# Altium PCB ZeroDriftLatchComp.PcbDoc
Units mil, origin at the board's own origin, x right, y up, seen from the top; angles counter-clockwise.
Board outline 500 x 500 mil, 2 copper layers (TOP COPPER, BOTTOM COPPER), stack 60.8 mil thick; 15 components, 11 nets, 31 pads, 6 vias.
Unrouted connection lines stored in the file: 16.
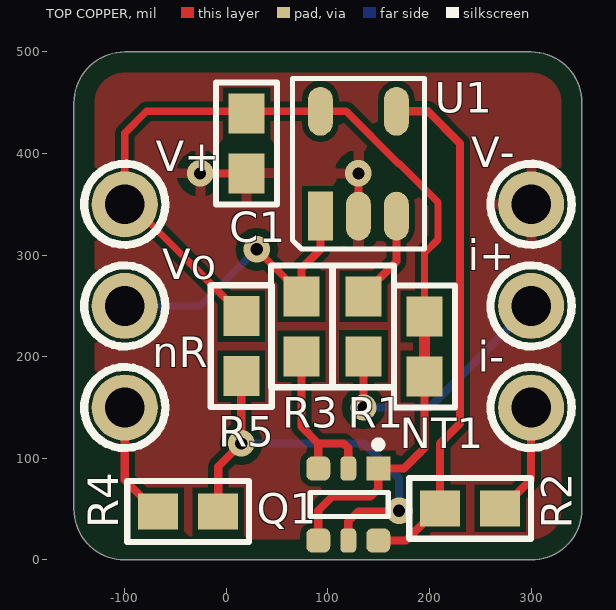
[diagram p0: TOP COPPER view]
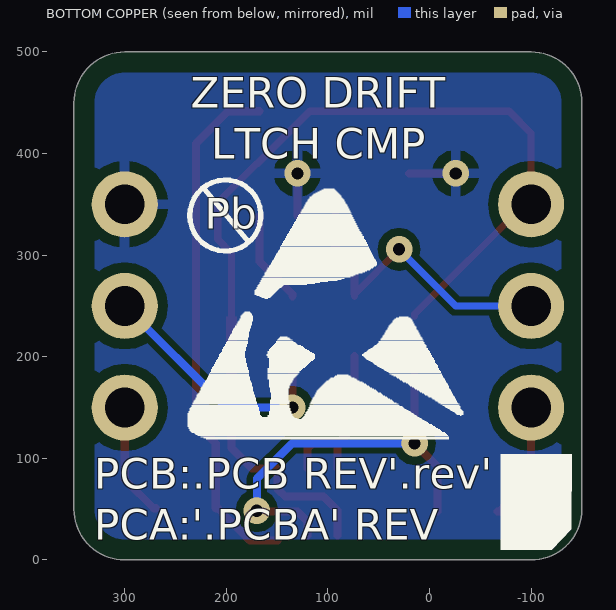
[diagram p1: BOTTOM COPPER view, seen from below]

## Layer stack, top to bottom
TOP SOLDER: solder mask 0.4, Solder Resist, Dk 3.5
TOP COPPER: signal copper 1.4
CORE: core 58, FR-4, Dk 4.8
BOTTOM COPPER: signal copper 1.4
BOTTOM SOLDER: solder mask 0.4, Solder Resist, Dk 3.5

## Board outline
-100,0 cw(c-100,50) -150,50 -150,450 cw(c-100,450) -100,500 300,500 cw(c300,450) 350,450 350,50 cw(c300,50) 300,0

## Design rules (kind name [scope] priority, off if disabled: settings)
AssemblyTestPointUsage [All] p1 off: valid=2
AssemblyTestpoint [(IsPad And (OnTopLayer Or OnBottomLayer)) Or (IsPad And OnMultiLayer)] p1 off: testpointundercomponent=FALSE minsize=26 maxsize=200 preferedsize=60 minholesize=0 maxholesize=100 preferedholesize=32 testpointgrid=5 usegrid=FALSE gridtolerance=1 allowsidetop=TRUE allowsidebottom=TRUE
BoardOutlineClearance [All] p1: gap=20 ignorepadtopadclearanceinfootprint=FALSE except(0: Arc-SplitContinuation Track-SplitContinuation SMDPad-SplitContinuation THPad-SplitContinuation Via-SplitContinuation Fill-SplitContinuation Poly-SplitContinuation Region-SplitContinuation Text-SplitContinuation)
Clearance Clearance_Typ [All] p1: gap=6 ignorepadtopadclearanceinfootprint=TRUE except(5: Via-Hole; 8: Via-Fill Via-Poly Via-Region; 10: Arc-Hole Track-Hole SMDPad-Hole THPad-THPad THPad-Fill THPad-Poly THPad-Region THPad-Hole Fill-Hole Poly-Hole Region-Hole Text-Hole)
ComponentClearance Fiducial [HasFootprint('FID')] p1: gap=7 collisioncheckmode=3 verticalgap=0 showdistances=FALSE
ComponentClearance "TP Clearance" [HasFootprint('TP')] p2: gap=5 collisioncheckmode=3 verticalgap=10 showdistances=FALSE // 6mil for test points
ComponentClearance [All] p3: gap=-5 collisioncheckmode=3 verticalgap=100000 showdistances=FALSE
DiffPairsRouting "USB 90ohm Zd" [(InDifferentialPairClass('USB 90ohm Zd'))] p1: maxlimit=15 minlimit=7 mostfreqgap=8 toplayer_minwidth=8 toplayer_maxwidth=25 toplayer_prefwidth=12 bottomlayer_minwidth=8 bottomlayer_maxwidth=25 bottomlayer_prefwidth=12 maxuncoupledlength=500
DiffPairsRouting [All] p2: maxlimit=10 minlimit=10 mostfreqgap=10 toplayer_minwidth=15 toplayer_maxwidth=15 toplayer_prefwidth=15 bottomlayer_minwidth=15 bottomlayer_maxwidth=15 bottomlayer_prefwidth=15 maxuncoupledlength=500
FabricationTestPointUsage [All] p1 off: valid=2 allowmultiple=FALSE
FabricationTestpoint [(IsPad And (OnTopLayer Or OnBottomLayer)) Or (IsPad And OnMultiLayer)] p1 off: side=3 testpointundercomponent=TRUE minsize=26 maxsize=200 preferedsize=60 minholesize=0 maxholesize=100 preferedholesize=32 testpointgrid=5 allowsidetop=TRUE allowsidebottom=TRUE usegrid=FALSE gridtolerance=1
HoleSize [All] p1: absolutevalues=TRUE maxlimit=300 minlimit=8 maxpercent=80.000 minpercent=20.000
HoleToHoleClearance "Ignore in pad vias" [(HasFootprint('0805 FeedThru CAP Filter') OR HasFootprint('16-PIN DFN W/THERMAL PAD'))] p1: gap=0 allowstackedmicrovias=TRUE
HoleToHoleClearance [All] p2: gap=10 allowstackedmicrovias=TRUE
MinimumAnnularRing [All] p1: minimumring=3
MinimumSolderMaskSliver MinimumSolderMaskSliver_1 [All] p1: minsoldermaskwidth=0
MinimumSolderMaskSliver "Solder Sliver BGA" [HasFootprint('4-WLP (0.84x0.84)')] p2: minsoldermaskwidth=0
MinimumSolderMaskSliver "Solder Sliver Footprint" [HasFootprint('QFN 16 EXPOSE PAD (3x3)')] p3: minsoldermaskwidth=0
MinimumSolderMaskSliver [All] p4: minsoldermaskwidth=2
PermittedLayers [All] p1: toplayerpermitted=TRUE bottomlayerpermitted=TRUE
PlaneConnect BatteryClipConnect [(HasFootprint('Battery Clip 2915'))] p1: pad.planeconnectstyle=Direct pad.reliefexpansion=20 pad.reliefentries=4 pad.reliefconductorwidth=10 pad.reliefairgap=10 via.planeconnectstyle=Relief via.reliefexpansion=20 via.reliefentries=4 via.reliefconductorwidth=10 via.reliefairgap=10
PlaneConnect HeaderConnect [(HasFootprint('Header 2 Pos 50mil'))] p2: pad.planeconnectstyle=Direct pad.reliefexpansion=20 pad.reliefentries=4 pad.reliefconductorwidth=10 pad.reliefairgap=10 via.planeconnectstyle=Relief via.reliefexpansion=20 via.reliefentries=4 via.reliefconductorwidth=10 via.reliefairgap=10
PlaneConnect [All] p3: planeconnectstyle=Relief reliefexpansion=10 reliefentries=4 reliefconductorwidth=8 reliefairgap=8
PolygonConnect "RF Shield Via" [InNet('AGND') vs IsNamedPolygon('AGND-TOP')] p1: thpad.connectstyle=Direct thpad.reliefconductorwidth=10 thpad.reliefentries=4 thpad.polygonreliefangle="90 Angle" thpad.airgapwidth=10 smdpad.connectstyle=Relief smdpad.reliefconductorwidth=10 smdpad.reliefentries=4 smdpad.polygonreliefangle="90 Angle" smdpad.airgapwidth=10 via.connectstyle=Direct via.reliefconductorwidth=10 via.reliefentries=4 via.polygonreliefangle="90 Angle" via.airgapwidth=10
PolygonConnect [All] p2: connectstyle=Relief reliefconductorwidth=10 reliefentries=4 polygonreliefangle="90 Angle" airgapwidth=10
RoutingVias [All] p1: holewidth=12 width=26 viastyle="Through Hole" minholewidth=8 minwidth=20 maxholewidth=28 maxwidth=42
SMDEntry [All] p1: side=TRUE corner=TRUE anyangle=FALSE
SMDToCorner SMDToCorner_Balun [(InNet('NetU7_3') OR InNet('NetU7_4'))] p1: distance=0
SMDToCorner [All] p2: distance=30000
SilkToSilkClearance [All] p1: silktosilkclearance=0
SilkToSolderMaskClearance [IsPad] p1: minsilkscreentomaskgap=0 clearancetoexposedcopper=FALSE
SolderMaskExpansion "Fine pitch foot prints" [HasFootprint('LQFP100') OR HasFootprint('LTC2448QFN-38N') OR HasFootprint('MSOP8') OR HasFootprint('16-pin DFN w/thermal pad') OR HasFootprint('10-PIN DFN W/THERMAL PAD')] p1: expansion=1 istentingtop=FALSE
SolderMaskExpansion [All] p2: expansion=2 istentingtop=FALSE
Width Width_General [All] p1: maxlimit=10 minlimit=7 preferedwidth=8 minimp=50.000000 maximp=50.000000 favimp=50.000000
18 further rules are at their usual default settings.

## Components (designator, comment, footprint, x,y, rotation, side; value= is the part's Value field where it differs from the comment)
C1 "0.1uF" "0603 CAP" 20,410 r270 top
i+ "Test Point PTH" "TP - PTH" 300,250 r0 top
i- "Test Point PTH" "TP - PTH" 300,150 r0 top
nR "Test Point PTH" "TP - PTH" -100,150 r180 top
NT1 "0.8Amax" "0603 NetTie" 195,210 r270 top net-tie
Q1 "NX3008PBKS,115" SOT363 149.53,90 r270 top
R1 "1k" "0603 RES" 134.99,230 r90 top
R2 "1k" "0603 RES" 240,50.83 r180 top
R3 "10k" "0603 RES" 74,230 r90 top
R4 "1k" "0603 RES" -37.54,47.76 r180 top
R5 "10k" "0603 RES" 14.68,210.36 r270 top
U1 "NCS21871SN2T1G" SOT-23-5 130,390 r90 top
V+ "Test Point PTH" "TP - PTH" -100,350 r270 top
V- "Test Point PTH" "TP - PTH" 300,350 r0 top
Vo "Test Point PTH" "TP - PTH" -100,250 r0 top

## Footprints (in the part's own frame and the unit in brackets; to place one, negate y for a bottom-side part, rotate by r counter-clockwise, add the part's x,y. Pads: shape width x height; smd on the part's side, far side on the other; paste and mask are expansions set on the pad)
"0603 CAP" [mm] "0603 Capacitor"
  rect 1x0.9 smd: 1(-0.75,0) 2(0.75,0)
  silkscreen extent -1.52,-0.76 1.52,0.76, body extent -0.81,-0.41 0.81,0.41, height 0.95
"0603 NetTie" [mm] "0603 NetTie"
  rect 1x0.9 smd: 1(-0.75,0) 2(0.75,0)
  TOP COPPER region: -0.75,0.127 0.762,0.127 0.762,-0.127 -0.75,-0.127
  silkscreen extent -1.52,-0.76 1.52,0.76
"0603 RES" [mm] "0603 Resistor"
  rect 1x0.9 smd: 1(-0.75,0) 2(0.75,0)
  silkscreen extent -1.52,-0.76 1.52,0.76, body extent -0.81,-0.41 0.81,0.41, height 0.95
SOT363 [mm]
  rect 0.6x0.6 smd: 1(0,0)
  rrect50% 0.6x0.4 smd: 2(0,-0.75) 5(1.8,-0.75)
  rrect50% 0.6x0.6 smd: 3(0,-1.5) 4(1.8,-1.5) 6(1.8,0)
  silkscreen extent -0.68,-1.7 1.2,0.25, body extent -0.15,-1.75 1.95,0.25, height 0.96
SOT-23-5 [mm]
  rect 1.22x0.62 smd: 1(-1.31,0.95)
  oval 1.22x0.62 smd: 2(-1.31,0) 3(-1.31,-0.95) 4(1.31,-0.95) 5(1.31,0.95)
  silkscreen extent -2.13,-1.65 2.13,1.65, body extent -1.57,-1.55 1.63,1.55, height 1.45
"TP - PTH" [mil] "PTH test point"
  round 65 hole 39 mask+2: 1(0,0)
  silkscreen extent -40,-40 40,40

## Part data
C1: library part C-0603-0u10-J50V-X7RC, "CAP CER 0.1UF 50V X7R 0603", AltMPN=GRM188R71H104JA93D, AltMPN1=C0603C104J5RACTU, MPN=CC0603JRX7R9BB104, Temperature Coefficient=X7R, Tolerance=J-5%, Vendor Max Voltage=50V, AltMfg=Murata, AltMfg1=KEMET, AVL="DigiKey, Mouser, Newark, Avnet, Arrow, Future, Allied, TTI, Heilind, Sager, Manufacturer Direct, Venkel", Component=CAPACITOR, Mfg=Yageo, Type=CERAMIC
i+ i- nR V+ V- Vo: "PTH Test Point"
NT1: library part 0603_NetTie, "RES 0 OHM 1/10W 1% 0603 SMD Thick Film Resistor", HelpURL=http://www.smtnet.com/library/files/upload/NetTies-and-How-to-Use-Them.pdf
Q1: "NX3008PBKS - 30 V, 200 mA dual P-channel Trench MOSFET", Supplier Part Number 1=1727-1282-1-ND, Mfg=Nexperia, MPN=NX3008PBKS,115, Pricing 1="1=0.33000, 10=0.24800, 25=0.21720, 100=0.11780, 500=0.09610, 1000=0.07130 (USD)", RoHS=No, Stock 1=86588, Supplier 1=Digi-Key
R1 R2 R4: library part R-0603-1K00-B-G, "RES SMD 1K OHM 0.1% 1/10W 0603", AltMPN=ERA-3AEB102V, AltMPN1=TFCR0603-10W-E-1001BT, MPN=RT0603BRB071KL, Power=0.1W, Tolerance=B-0.1%, AltMfg=Panasonic, AltMfg1=Venkel, AVL="DigiKey, Mouser, Newark, Avnet, Arrow, Future, Allied, TTI, Heilind, Sager, Manufacturer Direct, Venkel", HelpURL="G:\DATA\ISB Engineering\Electronics\AltiumWF\Libraries\Datasheets\Resistors\Yageo RT Series Thin Film Resistors.pdf", Mfg=Yageo
R3 R5: library part R-0603-10K0-B-G, "RES SMD 10K OHM 0.1% 1/10W 0603", AltMPN=ERA-3AEB103V, AltMPN1=TFCR0603-10W-E-1002BT, MPN=RT0603BRD0710KL, Power=0.1W, Tolerance=B-0.1%, AltMfg=Panasonic, AltMfg1=Venkel, AVL="DigiKey, Mouser, Newark, Avnet, Arrow, Future, Allied, TTI, Heilind, Sager, Manufacturer Direct, Venkel", HelpURL="G:\DATA\ISB Engineering\Electronics\AltiumWF\Libraries\Datasheets\Resistors\Yageo RT Series Thin Film Resistors.pdf", Mfg=Yageo
U1: Supplier Part Number 1=C316C622F2G5TA7301-ND, Mfg="ON Semiconductor", MPN=NCS21871SN2T1G, Pricing 1="2500=1.00588 (USD)", RoHS=No, Supplier 1=Digi-Key

## Via types
v1: diameter 26, hole 12, TOP COPPER to BOTTOM COPPER, tented both sides, 6 vias

## Nets (pads, with @x,y where several pads share a name; then routed paths per layer and width w, separated by ;. In a path a pad name is that pad's centre, name@x,y a point inside that pad or via, vN(x,y) a via of type N, cw(c..) or ccw(c..) an arc to the next point about the centre after c; other vN are vias at no path point)
GND: C1.2 U1.2 V-.1 | length 87.8
  TOP COPPER w8: v1(-25.78,380.47) C1.2 ; U1.2 v1(130,380.47)
Neti+_1: i+.1 R1.1 | length 256.9
  TOP COPPER w8: v1(134.99,150) R1.1
  BOTTOM COPPER w8: v1(134.99,150) 200,150 i+.1
Neti-_1: i-.1 R2.1 | length 112.9
  TOP COPPER w8: R2.1 271.5,50.83 300,79.34 i-.1
NetnR_1: nR.1 R4.2 | length 117
  TOP COPPER w8: nR.1 -100,78.73 -69.03,47.76 R4.2
NetNT1_2: NT1.2 Q1.1 Q1.4 | length 236.7
  TOP COPPER w8: Q1.4@90.47,24 90.47,48.71 104.26,62.49 142.02,62.49 149.53,70 Q1.1 174.82,90 195,110.18 NT1.2
NetQ1_2: Q1.2 Q1.3 R3.1 | length 168.8
  TOP COPPER w8: R3.1 74,131.15 90.47,114.68 ; Q1.3 90.47,114.68 ; Q1.2 120,109.99 115.31,114.68 90.47,114.68
NetQ1_5: Q1.5 R4.1 R5.2 | length 411.9
  TOP COPPER w8: R4.1 -8.01,91.99 v1(14.68,114.68) R5.2 ; Q1.5@120,24 120,37.76 130,47.76 169.27,47.76 v1(170,48.49)
  BOTTOM COPPER w8: v1(14.68,114.68) 135.32,114.68 170,80 v1(170,48.49)
NetQ1_6: Q1.6 R2.2 U1.4 | length 517
  TOP COPPER w8: Q1.6 176.81,19.13 208.5,50.83 R2.2 210.47,114.68 230,134.2 230,410 198.43,441.57 U1.4
NetR1_2: R1.2 U1.3 | length 92.3
  TOP COPPER w8: R1.2 134.99,261.5 167.4,293.91 U1.3
NetR3_2: R3.2 U1.1 Vo.1 | length 302.2
  TOP COPPER w7: v1(30,305.78) 30,305.5 74,261.5 R3.2
  TOP COPPER w8: R3.2@74,261.5 74,286.9 92.6,305.5 U1.1
  BOTTOM COPPER w7: Vo.1 -25.78,250 v1(30,305.78)
VCC: C1.1 NT1.1 R5.1 U1.5 V+.1 | length 704
  TOP COPPER w7: R5.1 14.68,241.86 -93.46,350 V+.1 -100,420 -78.43,441.57 U1.5 117.95,441.57 169.53,390 170.47,390 208.5,351.97 208.5,315.57 195,302.07 NT1.1

## Polygon pours and split planes (outlines as drawn)
GND on BOTTOM COPPER "BOT_GND" (solid, pour order 3): -100,0 cw(c-100,50) -150,50 -150,450 cw(c-100,450) -100,500 300,500 cw(c300,450) 350,450 350,50 cw(c300,50) 300,0
GND on TOP COPPER "TOP_GND" (solid, pour order 2): -100,0 cw(c-100,50) -150,50 -150,450 cw(c-100,450) -100,500 300,500 cw(c300,450) 350,450 350,50 cw(c300,50) 300,0

## Silkscreen, mask and mechanical layers (free items; w line width, h text height)
BOTTOM SILK:
  drawing of 459 lines, arcs and shapes, not listed
  text "ZERO DRIFT" at 235,445 h30
  text "LTCH CMP" at 215,395 h30
  text "Pb" at 221.38,325.81 h30
  text "PCB:.PCB REV'.rev'" at 330,70 h30
  text "PCA:'.PCBA' REV" at 330,20 h30
Board Outline:
  lines w5: -150,50 ccw(c-100,50) -100,0 0,0 300,0 ccw(c300,50) 350,50 350,450 ccw(c300,450) 300,500 0,500 -100,500 ccw(c-100,450) -150,450 -150,50
Drill Drawing:
  drawing of 272 lines, arcs and shapes, not listed
  text "3" at 6210.87,8450.83 h80
  text "2" at 9510.87,8450.83 h80
  text "1" at 12860.87,8450.83 h80
  text "6" at -3784.13,8446.3 h80
  text "5" at -434.13,8446.3 h80
  text "4" at 2865.87,8446.3 h80
  text "REVISION RECORD" at 12435.87,8235.83 h60
  text "DESCRIPTION" at 11775,8050 h60
  text "REV" at 11089.9,8049.24 h60
  text "APPROVED:" at 13447.4,8041.27 h60
  text "DATE:" at 14177.4,8041.27 h60
  text "Layer" at -4984.67,8025 h60
  text "Name" at -4574.75,8025 h60
  text "Material" at -3675,8025 h60
  text "Thickness" at -2815.23,8025 h60
  text "Constant" at -2165.4,8025 h60
  text "Board Layer Stack" at -1595.54,8025 h60
  text "Symbol" at -210.74,8000 h72
  text "Count" at 295.14,8000 h72
  text "Hole Size" at 825,8000 h72
  text "Plated" at 1914.68,8000 h72
  text "Hole Type" at 2420.56,8000 h72
  text "Drill Layer Pair" at 3154.36,8000 h72
  text "Via/Pad" at 4803.86,8000 h72
  text "Pad Shape" at 5393.71,8000 h72
  text "TOP SILK" at -4574.75,7905 h60
  text "6" at 295.14,7850 h60
  text "12.00mil (0.305mm)" at 825,7850 h60
  text "PTH" at 1914.68,7850 h60
  text "Round" at 2420.56,7850 h60
  text "TOP COPPER - BOTTOM COPPER" at 3154.36,7850 h60
  text "Via" at 4803.86,7850 h60
  text "Rounded" at 5393.71,7850 h60
  text "1" at 11099.9,7849.24 h60
  text "ZERO DRIFT LATCHING COMPARATOR" at 11374.9,7849.24 h60
  text ".drawn" at 13417.4,7831.27 h60
  text "24.Nov.2020" at 14047.4,7831.74 h60
  text "TOP SOLDER" at -4574.75,7785 h60
  text "Solder Resist" at -3675,7785 h60
  text "0.40mil" at -2815.23,7785 h60
  text "3.5" at -2165.4,7785 h60
  text "6" at 295.14,7700 h60
  text "39.00mil (0.991mm)" at 825,7700 h60
  text "PTH" at 1914.68,7700 h60
  text "Round" at 2420.56,7700 h60
  text "TOP COPPER - BOTTOM COPPER" at 3154.36,7700 h60
  text "Pad" at 4803.86,7700 h60
  text "Rounded" at 5393.71,7700 h60
  text "1" at -4984.67,7665 h60
  text "TOP COPPER" at -4574.75,7665 h60
  text "Copper" at -3675,7665 h60
  text "1.40mil" at -2815.23,7665 h60
  text "12 Total" at 295.14,7550 h60
  text "CORE" at -4574.75,7545 h60
  text "FR-4" at -3675,7545 h60
  text "58.00mil" at -2815.23,7545 h60
  text "4.8" at -2165.4,7545 h60
  text "2" at -4984.67,7425 h60
  text "BOTTOM COPPER" at -4574.75,7425 h60
  text "Copper" at -3675,7425 h60
  text "1.40mil" at -2815.23,7425 h60
  text "BOTTOM SOLDER" at -4574.75,7305 h60
  text "Solder Resist" at -3675,7305 h60
  text "0.40mil" at -2815.23,7305 h60
  text "3.5" at -2165.4,7305 h60
  text "BOTTOM SILK" at -4574.75,7185 h60
  text "D" at -5684.13,6446.3 h80
  text "D" at 14665.87,6396.3 h80
  text "NOTES:" at 8766.4,4952.74 h80
  text "1. FINAL BOARD THICKNESS TO BE +/-10% OF TOTAL SHOWN IN LAYER STACK UP DETAIL." at 8766.4,4827.52 h80
  text "2. FABRICATE IN ACCORDANCE WITH IPC-D-610, LATEST REV." at 8766.4,4690.87 h80
  text "3. SOLDER MASK FOR TOP AND BOTTOM IS BLUE LPI." at 8766.4,4542.8 h80
  text "4. APPLY SILKSCREEN TO BOTH SIDES USING WHITE EPOXY INK." at 8766.4,4406.15 h80
  text "5. WARP AND TWIST NOT TO EXCEED .010 PER INCH." at 8766.4,4269.51 h80
  text "6. ALL DIMENSIONS ARE IN INCHES, HOLES SIZES ARE FINISHED SIZES." at 8761.32,4150.35 h80
  text "7. THIS IS A 4 LAYER BOARD. REFER TO THE LAYER DETAIL." at 8761.32,4002.28 h80
  text "8.  BOARDS TO BE CLEAN AND FREE OF FOREIGN MATERIAL." at 8761.32,3865.63 h80
  text "9.  BREAK ALL SHARP CORNERS." at 8761.32,3728.98 h80
  text "10. FINISH TO BE ENIG AND COMPLY WITH IPC-4552 LATEST REV." at 8741.4,3586.27 h80
  text "11. BOARD MUST BE RoHS/WEEE COMPLIANT." at 8741.4,3446.55 h80
  text "12. THIS BOARD IS 6/6MIL TRACE/CLEARANCE MINIMUM DESIGN RULES" at 8741.4,3309.9 h80
  text "13. PCB FABRRICATOR TO APPLY UL MARK, 94V-0 AND DATE CODE." at 8741.4,3176.11 h80
  text "14. TOLERANCES ARE NOT CUMULATIVE" at 8741.4,3028.04 h80
  text "15. PCB OUTLINE SHOWN ON 'Board Outline' or 'Mechanical 2' LAYER AND IS FOR REF. ONLY" at 8741.4,2911.39 h80
  text "DO NOT PLACE OUTLINE ON FINAL PCB." at 8962.4,2786.74 h80
  text "C" at 14665.87,2696.3 h80
  text "C" at -5658.12,2679.05 h80
  text "16. BARE PCB CLEANLINES SHOULD BE IN ACCORDANCE WITH IPC-5704" at 8756.4,2651.39 h80
  text "17. REFLOW SOLDERING SPECIFIED BY J-STD-020D. DO NOT EXCEED 250C" at 8757.4,2496.74 h80
  text "B" at -5658.12,-1120.95 h80
  text "B" at 14665.87,-1153.7 h80
  text "A" at -5658.12,-4970.95 h80
  text "COMPANY:" at 8953.6,-5483.26 h50
  text "DIVSION:" at 11424.97,-5489.09 h50
  text "ANALOG DESIGN REF." at 9353.6,-5608.26 h120
  text "NEW PRODUCT INTRODUCTION" at 11861.97,-5608.26 h120
  text "TITLE:" at 11441.97,-5791.02 h50
  text "DRAWN:" at 10447,-5815.09 h50
  text "TOLERANCES:" at 8953.6,-5833.26 h50
  text "FABRICATION DRAWING," at 11861.97,-5991.02 h125
  text ".drawn" at 10528.6,-6033.26 h75
  text "+" at 9650.97,-6066.02 h50
  text ".XX   .01" at 9448.97,-6079.02 h60
  text "-" at 9650.97,-6106.02 h50
  text ".project" at 11856,-6205.09 h125
  text "+" at 9721.97,-6259.98 h50
  text ".XXX   .002" at 9458.97,-6282.98 h60
  text "-" at 9721.97,-6314.98 h50
  text "CODE:" at 11431.97,-6341.02 h50
  text "SIZE:" at 11961.97,-6341.02 h50
  text "REV:" at 13543.5,-6355.17 h50
  text "DRAWING NO:" at 12491.97,-6361.02 h50
  text "DATED:" at 10447,-6390.09 h50
  text "+" at 9845.97,-6496.98 h50
  text ".rev" at 13794.97,-6499.02 h100
  text "B" at 12183.5,-6505.17 h60
  text "ANGLES   1" at 9455.97,-6513.98 h60
  text ".PCB" at 12634.97,-6519.02 h100
  text "-" at 9846.97,-6536.98 h50
  text ".drawnDate" at 10553.6,-6633.26 h75
  text "SCALE:" at 11442,-6720.09 h50
  text "SHEET:     OF" at 12542,-6720.09 h50
  text "1" at 12858.97,-6730.02 h75
  text "1" at 13131.97,-6730.02 h75
  text "6" at -3782.6,-7220.95 h80
  text "5" at -432.6,-7220.95 h80
  text "4" at 2867.4,-7220.95 h80
  text "3" at 6217.4,-7220.95 h80
  text "2" at 9517.4,-7220.95 h80
  text "1" at 12867.4,-7220.95 h80
Bottom Assy:
  circle w10: c-258.97,-4860.73 r13.5
  circle w10: c-1075,51.18 r66.57
  lines w10: -5282.1,-2885.76 -4782.1,-2885.76 ; -5280.1,-485.76 -4780.1,-485.76 ; -5280.1,1864.24 -4780.1,1864.24 ; -4780.1,3064.24 -4780.1,4264.24 ; -4778.1,-5236.83 -4778.1,-3807.76 ; -4775.1,-5233.76 -4775.1,-3803.76 ; -4774.97,-5236.83 -4774.97,-3806.76 -1575,-3806.76 -1575,-4097.76 ; -4774.97,-4976.83 -1575,-4976.83 ; -4774.97,-4686.83 -575.02,-4674.97 ; -4774.97,-4097.76 -1575,-4097.76 ; -3695,-4975.76 -3695,-4686.83 ; -2625,-5234.41 -2625,-4686.83 ; -2115,-4975.76 -2115,-4686.83 ; -2009.1,4264.24 -2009.1,4759.24 ; -2000.07,-5739.41 -2000.07,-5239.41 ; -1602.97,-3806.76 -1559.97,-3806.76 ; -1575,-5234.41 -1575,-3807.76 ; -1569.97,-3806.76 938.4,-3806.76 938.4,-4097.76 ; -1330.1,4264.24 -4780.1,4264.24 ; -1005,51.29 -153.2,51.29 ; -575,-5236.83 -575,-4097.76 ; -194.38,1.29 -153.2,51.29 ; -194.38,101.29 -153.2,51.29 ; 504.93,-5739.41 504.93,-5239.41 ; 519.9,4264.24 519.9,4764.24 ; 938.4,-5235.76 938.4,-4097.76 ; 2999.93,-5734.41 2999.93,-5234.41 ; 3019.9,4264.24 3019.9,4764.24 ; 5499.93,-5734.41 5499.93,-5234.41 ; 5519.9,4264.24 5519.9,4764.24 ; 8019.9,4264.24 8019.9,4764.24 ; 8028.93,-5734.41 8028.93,-5234.41 ; 10219.9,-2885.76 10719.9,-2885.76 ; 10219.93,-481.41 10719.93,-481.41 ; -4780.1,4264.24 -4780.1,-5235.76 10219.9,-5235.76 10219.9,4264.24 -4780.1,4264.24 ; -1575,-4097.76 938.4,-4097.76 ; 10220.04,1855.31 10720.04,1855.31 10220.04,1855.31
  text "2" at -730.1,4364.24 h60
  text "4" at 4269.9,4364.24 h60
  text "5" at 6769.9,4364.24 h60
  text "6" at 9269.9,4364.24 h60
  text "1" at -3259.1,4359.24 h60
  text "3" at 1930.37,4354.71 h60
  text "D" at -4880.1,3064.24 h60
  text "D" at 10469.9,3064.24 h60
  text "C" at 10619.93,668.59 h60
  text "C" at -4880.1,664.24 h60
  text "9." at -1030.53,26.18 h50
  text "B" at -4880.1,-1685.76 h60
  text "BOTTOM SIDE SHOWN" at 1125.68,-2724.41 h60
  text "COMPANY:" at 863.4,-3900 h50
  text "DIVSION:" at -1607.97,-3905.83 h50
  text "NEW PRODUCT INTRODUCTION" at -2044.97,-4025 h120
  text "ANALOG DESIGN REF." at 463.4,-4025 h120
  text "A" at -4880.1,-4085.76 h60
  text "A" at 10469.9,-4085.76 h60
  text "TITLE:" at -1624.97,-4207.76 h50
  text "DRAWN:" at -630,-4231.83 h50
  text "TOLERANCES:" at 863.4,-4250 h50
  text "ASSEMBLY DRAWING," at -2044.97,-4407.76 h125
  text ".drawn" at -711.6,-4450 h75
  text "+" at 166.03,-4482.76 h50
  text ".XX   .01" at 368.03,-4495.76 h60
  text "-" at 166.03,-4522.76 h50
  text ".project" at -2039,-4621.83 h125
  text "+" at 95.03,-4676.73 h50
  text ".XXX   .002" at 358.03,-4699.73 h60
  text "-" at 95.03,-4731.73 h50
  text "SIZE:" at -2144.97,-4757.76 h50
  text "CODE:" at -1614.97,-4757.76 h50
  text "REV:" at -3726.5,-4771.91 h50
  text "DRAWING NO:" at -2674.97,-4777.76 h50
  text "DATED:" at -630,-4806.83 h50
  text "+" at -28.97,-4913.73 h50
  text ".rev" at -3977.97,-4915.76 h100
  text "B" at -2366.5,-4921.91 h60
  text "ANGLES   1" at 361.03,-4930.73 h60
  text ".PCBA" at -2817.97,-4935.76 h100
  text "-" at -29.97,-4953.73 h50
  text ".drawnDate" at -736.6,-5050 h75
  text "SHEET:     OF" at -2725,-5136.83 h50
  text "SCALE:" at -1625,-5136.83 h50
  text "2" at -3314.97,-5146.76 h75
  text "1" at -3041.97,-5146.76 h75
  text "1" at 9124.93,-5624.41 h60
  text "6" at -3100.07,-5629.41 h60
  text "5" at -750.07,-5629.41 h60
  text "4" at 1749.93,-5629.41 h60
  text "3" at 4249.93,-5629.41 h60
  text "2" at 6749.93,-5629.41 h60
Top Assy:
  circle w10: c6475,650 r66.57
  circle w10: c5697.37,-4860.73 r13.5
  lines w10: -5283.63,-2885.76 -4783.63,-2885.76 ; -5283.63,-485.76 -4783.63,-485.76 ; -5283.63,1864.24 -4783.63,1864.24 ; -2612.66,-5734.41 -2612.66,-5234.41 ; -2532.6,4264.24 -2532.6,4764.24 ; -83.66,-5734.41 -83.66,-5234.41 ; -83.63,4264.24 -83.63,4764.24 ; 2416.34,-5734.41 2416.34,-5234.41 ; 2576.84,4269.71 2576.84,4769.71 ; 4500,-5235.76 4500,-4097.76 ; 4911.34,-5739.41 4911.34,-5239.41 ; 4916.37,4264.24 4916.37,4764.24 ; 6013.4,-5236.83 6013.4,-4097.76 ; 6013.42,-4674.97 10213.37,-4686.83 ; 6766.37,3664.24 10216.37,3664.24 ; 6766.37,3864.24 10216.37,3864.24 ; 6766.37,4064.24 10216.37,4064.24 ; 6998.37,-3806.76 7041.37,-3806.76 ; 7008.37,-3806.76 4500,-3806.76 4500,-4097.76 ; 7013.4,-5234.41 7013.4,-3807.76 ; 7013.4,-4976.83 10213.37,-4976.83 ; 7352.37,3265 7352.37,4064.24 ; 7416.34,-5739.41 7416.34,-5239.41 ; 7416.37,4264.24 7416.37,4764.24 ; 7553.4,-4975.76 7553.4,-4686.83 ; 8063.4,-5234.41 8063.4,-4686.83 ; 8852.37,3265 8852.37,4064.24 ; 9133.4,-4975.76 9133.4,-4686.83 ; 9572.37,3260 9572.37,4064.24 ; 10213.37,-5236.83 10213.37,-3806.76 7013.4,-3806.76 7013.4,-4097.76 ; 10213.37,-4097.76 7013.4,-4097.76 ; 10216.37,1855.59 10716.37,1855.59 ; 10216.37,3064.24 10216.37,4264.24 ; 10216.37,3264.24 6766.37,3264.24 6766.37,3464.24 ; 10218.37,-2885.76 10718.37,-2885.76 ; 10222.37,-479.76 10722.37,-479.76 ; 4500,-4097.76 7013.4,-4097.76 ; 6766.37,3464.24 10216.37,3464.24 6766.37,3464.24 ; 6766.37,3464.24 6766.37,4264.24 10216.37,4264.24 ; 10216.37,4264.24 -4783.63,4264.24 -4783.63,-5235.76 10216.37,-5235.76 10216.37,4264.24
  text "6" at -3683.63,4364.24 h60
  text "3" at 3666.37,4364.24 h60
  text "4" at 1326.84,4354.71 h60
  text "REVISION RECORD" at 8016.37,4114.24 h60
  text "REV" at 6966.37,3914.24 h60
  text "DESCRIPTION:" at 7866.37,3914.24 h60
  text "APPROVED:" at 9016.37,3914.24 h60
  text "DATE:" at 9802.37,3914.24 h60
  text "1" at 7020.37,3744.24 h60
  text "ZERO DRIFT LATCHING COMP" at 7400,3725 h60
  text ".drawn" at 9087.4,3720.59 h60
  text "24.Nov.2020" at 9632.4,3715.59 h60
  text "D" at -5033.63,3064.24 h60
  text "D" at 10316.37,3064.24 h60
  text "ASSEMBLY NOTES:" at 6490.4,2258.38 h60
  text "1. THIS BOARD MAY HAVE ALTERNATE ASSEMBLY VARIATIONS" at 6490.4,2133.38 h60
  text "ALWAYS CHECK FOR CORRECT AND LATEST BILL OF MATERIALS." at 6608.4,2039.59 h60
  text "2. WORKMANSHIP STANDARD TO BE IN COMPLIANCE WITH" at 6490.4,1948.96 h60
  text "IPC-A-610 LATEST REVISION." at 6608.4,1858.59 h60
  text "3. SQUARE PADS AND OR SILKSCREEN DENOTE THE FOLLOWING:" at 6490.4,1770.25 h60
  text "PIN 1 OF IC'S, CONNECTORS, DIODE CATHODE, & + OF CAPACITORS." at 6608.4,1681.59 h60
  text "4. MARK APPLICABLE REVISION LEVEL IN LOCATION PROVIDED" at 6490.4,1587.91 h60
  text "USING BLACK PERMANENT INK OR NONSMEAR NAMEPLATE." at 6608.4,1493.59 h60
  text "5. VENDOR WILL INDICATE VENDOR CODE AND DATE CODE" at 6490.4,1403.49 h60
  text "ON BOTTOM SIDE IN APPROX LOCATION DENOTED (BOTTOM SIDE)." at 6608.4,1309.59 h60
  text "6. ASSEMBLED BOARD SHALL BE SHIPPED IN ESD BAGS" at 6490.4,1219.07 h60
  text "THAT PROVIDE ESD DRAIN." at 6608.4,1123.59 h60
  text "7. RoHS/WEEE COMPLIANT ASSEMBLY" at 6490.4,1043.21 h60
  text "8. NOTES 5 AND 6 MAY BE REPLACED WITH NONSMEAR NAMEPLATE" at 6490.4,942.43 h60
  text "NAMEPLATE TO INCLUDE ASSY REV LEVEL, &  DATE CODE" at 6608.4,857.59 h60
  text "ALL BARCODES MUST BE ACCOMPANIED BY READABLE CHARACTERS." at 6597.4,763.09 h60
  text "C" at 10472.37,670.24 h60
  text "C" at -5033.63,664.24 h60
  text "9." at 6443.5,633.66 h60
  text "MARK THE ASSY REVISION ('.rev') IN THE LOCATION DENOTED" at 6593.5,633.66 h60
  text "10. PART/ASSEMBLY SHALL BE IN COMPLIANCE WITH DIRECTIVE 2011/65/EU" at 6443.49,451.41 h60
  text "OF THE EUROPEAN PARLIAMENT CONCERNING THE RESTRICTION OF CERTAIN" at 6593.49,351.41 h60
  text "HAZARDOUS SUBSTANCES IN ELECTRICAL AND ELECTRONIC EQUIPMENT" at 6586,241.16 h60
  text "WITHOUT EXEMPTION" at 6586,141.16 h60
  text "B" at -5033.63,-1685.76 h60
  text "TOP SIDE SHOWN" at 332.65,-2706.91 h60
  text "COMPANY:" at 4575,-3900 h50
  text "DIVSION:" at 7046.37,-3905.83 h50
  text "ANALOG DESIGN REF." at 4975,-4025 h120
  text "NEW PRODUCT INTRODUCTION" at 7483.37,-4025 h120
  text "A" at -5033.63,-4085.76 h60
  text "A" at 10316.37,-4085.76 h60
  text "TITLE:" at 7063.37,-4207.76 h50
  text "DRAWN:" at 6068.4,-4231.83 h50
  text "TOLERANCES:" at 4575,-4250 h50
  text "ASSEMBLY DRAWING," at 7483.37,-4407.76 h125
  text ".drawn" at 6150,-4450 h75
  text "+" at 5272.37,-4482.76 h50
  text ".XX   .01" at 5070.37,-4495.76 h60
  text "-" at 5272.37,-4522.76 h50
  text ".project" at 7477.4,-4621.83 h125
  text "+" at 5343.37,-4676.73 h50
  text ".XXX   .002" at 5080.37,-4699.73 h60
  text "-" at 5343.37,-4731.73 h50
  text "CODE:" at 7053.37,-4757.76 h50
  text "SIZE:" at 7583.37,-4757.76 h50
  text "REV:" at 9164.9,-4771.91 h50
  text "DRAWING NO:" at 8113.37,-4777.76 h50
  text "DATED:" at 6068.4,-4806.83 h50
  text "+" at 5467.37,-4913.73 h50
  text ".rev" at 9416.37,-4915.76 h100
  text "B" at 7804.9,-4921.91 h60
  text "ANGLES   1" at 5077.37,-4930.73 h60
  text ".PCBA" at 8256.37,-4935.76 h100
  text "-" at 5468.37,-4953.73 h50
  text ".drawnDate" at 6175,-5050 h75
  text "SCALE:" at 7063.4,-5136.83 h50
  text "SHEET:     OF" at 8163.4,-5136.83 h50
  text "1" at 8480.37,-5146.76 h75
  text "2" at 8753.37,-5146.76 h75
  text "1" at -3708.66,-5624.41 h60
  text "2" at -1333.66,-5629.41 h60
  text "3" at 1166.34,-5629.41 h60
  text "4" at 3666.34,-5629.41 h60
  text "5" at 6166.34,-5629.41 h60
  text "6" at 8516.34,-5629.41 h60

## Dimensions
300,450 to 445,595 on Drill Drawing
-100,350 to -100,500 on Drill Drawing
-100,0 to 0,500 on Drill Drawing
-100,150 to 300,150 on Drill Drawing
-150,50 to 350,50 on Drill Drawing